# EAGLE board PCBlayout (EAGLE 9.6.2)
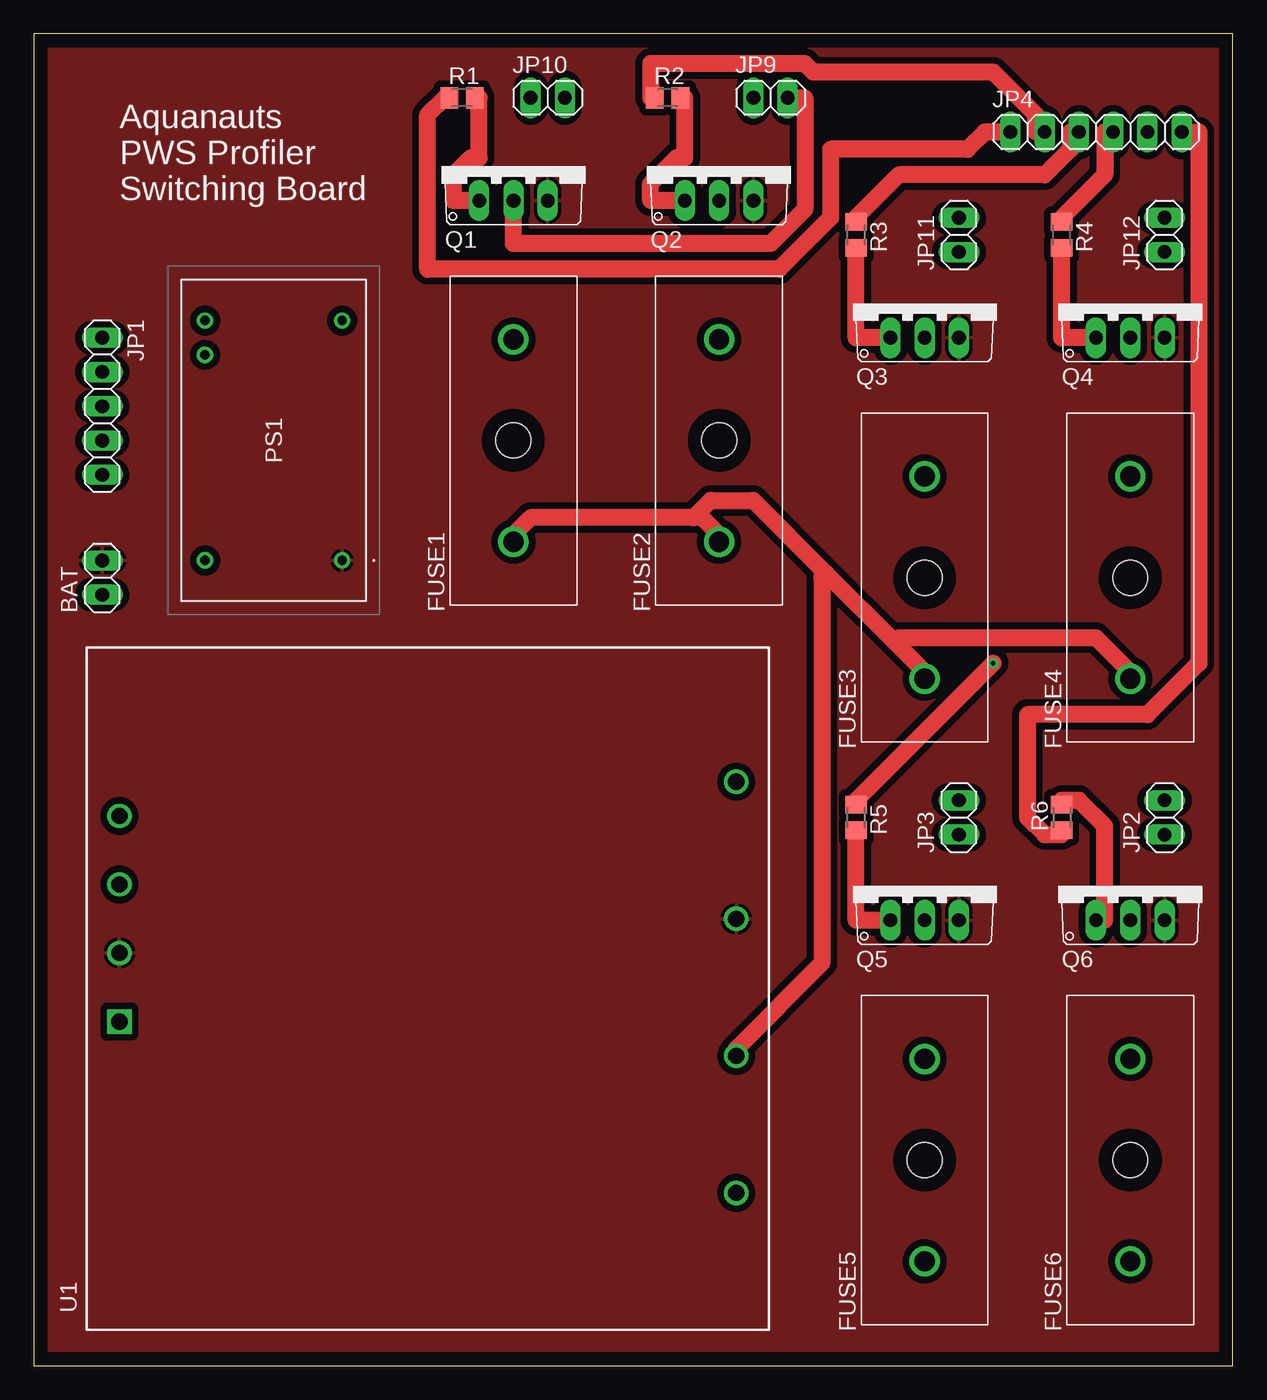
[diagram p0: board, top side]
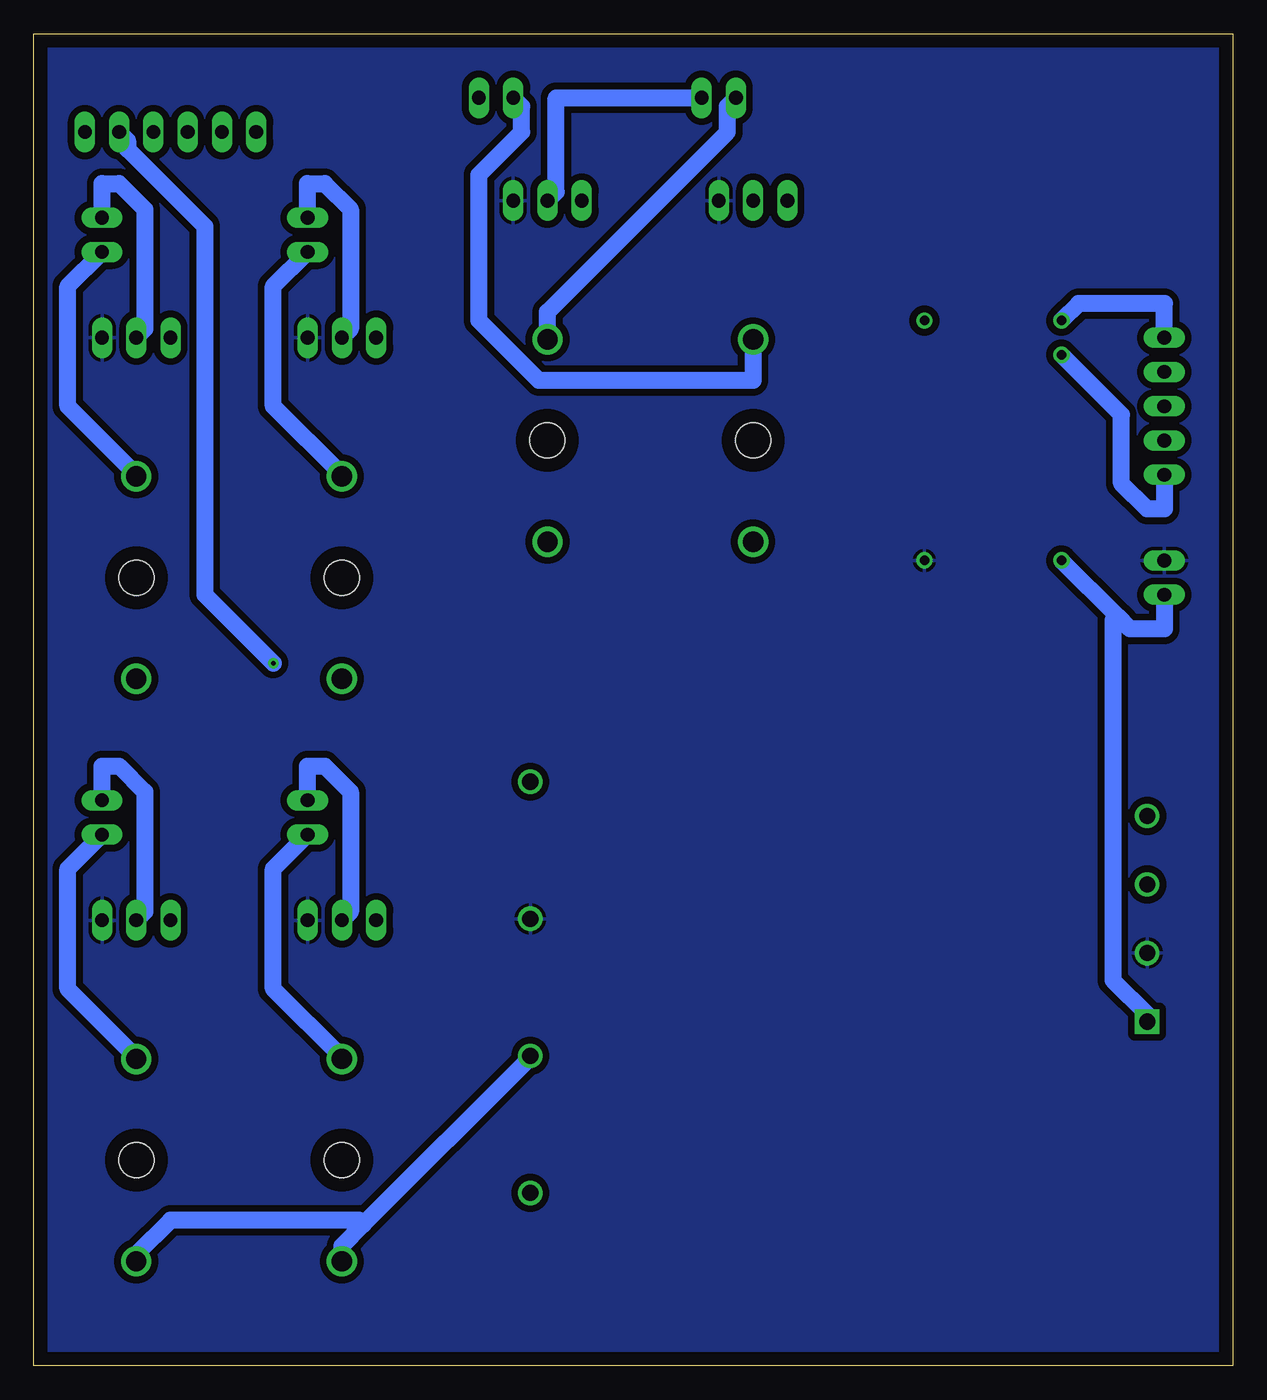
[diagram p1: board, bottom side, seen from below]

Size 88.88 x 98.73 mm. Coordinates in mm from the lower left corner, seen from the top.
Outline: 0,0 88.88,0 88.88,98.73 0,98.73 0,0
Copper layers (1*16): Top 0.036mm / dielectric 1.6mm / Bottom 0.036mm
Design rules "default *": minimum track width 1.25mm, minimum drill 0.35mm, track to track 0.5mm, track to pad 6mil, pad to pad 6mil, via to via 6mil, smd to smd 6mil, copper to edge 40mil, drill to drill 6mil, minimum pad ring 10mil, minimum via ring 8mil, stop-mask expansion 4mil, vias tented up to drill 0mil, thermal gap 10mil

## Footprints (pad centres in the part's own frame; a part is rotated, then mirrored left to right if it is on the bottom)
1X02 = drill 1.016 long: 1 -1.27,0; 2 1.27,0
FUSE_696105003002 = drill 1.5: 1 -7.5,0; 2 7.5,0 | hole 2.6: 0,0
1X05 = drill 1.016 long: 1 -5.08,0; 2 -2.54,0; 3 0,0; 4 2.54,0; 5 5.08,0
1X06 = drill 1.016 long: 1 -6.35,0; 2 -3.81,0; 3 -1.27,0; 4 1.27,0; 5 3.81,0; 6 6.35,0
TEL122411 = drill 0.7 pad 1.2: 1 0,0; 8 17.78,0; 9 17.78,10.16; 10 15.24,10.16; 16 0,10.16
TO220V = drill 1.016 long: 1 -2.54,-2.54; 2 0,-2.54; 3 2.54,-2.54
M0805 = smd 1.3 x 1.6: 1 -0.95,0; 2 0.95,0
CONV_SDM30-24S12 = drill 1.2 pad 1.8 square: 1 -2.43,22.86 | drill 1.2 pad 1.8: 2 2.65,22.86; 3 7.73,22.86; 4 12.81,22.86; 5 -15.13,-22.86; 6 -4.97,-22.86; 7 5.19,-22.86; 8 15.35,-22.86

## Placement (x,y rotation side)
BAT  [1X02]  5.08,58.42 90 top
FUSE1  696105003002  [FUSE_696105003002]  35.56,68.58 90 top
FUSE2  696105003002  [FUSE_696105003002]  50.8,68.58 90 top
FUSE3  696105003002  [FUSE_696105003002]  66.04,58.42 90 top
FUSE4  696105003002  [FUSE_696105003002]  81.28,58.42 90 top
FUSE5  696105003002  [FUSE_696105003002]  66.04,15.24 90 top
FUSE6  696105003002  [FUSE_696105003002]  81.28,15.24 90 top
JP1  Micro USB to Pi  [1X05]  5.08,71.12 270 top
JP2  sensor6  [1X02]  83.82,40.64 90 top
JP3  sensor5  [1X02]  68.58,40.64 90 top
JP4  PI 5V  [1X06]  78.74,91.44 0 top
JP9  sensor1  [1X02]  54.61,93.98 0 top
JP10  sensor2  [1X02]  38.1,93.98 0 top
JP11  sensor3  [1X02]  68.58,83.82 90 top
JP12  sensor4  [1X02]  83.82,83.82 90 top
PS1  TEL_12-2411  [TEL122411]  22.86,59.69 90 top
Q1  [TO220V]  35.56,88.9 0 top
Q2  [TO220V]  50.8,88.9 0 top
Q3  [TO220V]  66.04,78.74 0 top
Q4  [TO220V]  81.28,78.74 0 top
Q5  [TO220V]  66.04,35.56 0 top
Q6  [TO220V]  81.28,35.56 0 top
R1  10k  [M0805]  31.75,93.98 0 top
R2  10k  [M0805]  46.99,93.98 0 top
R3  10k  [M0805]  60.96,83.82 270 top
R4  10k  [M0805]  76.2,83.82 270 top
R5  10k  [M0805]  60.96,40.64 270 top
R6  10k  [M0805]  76.2,40.64 90 top
U1  SDM30-24S12  [CONV_SDM30-24S12]  29.21,27.94 90 top

## Library data of the parts
BAT JP1-JP4 JP9-JP12 = pinhead
FUSE1-FUSE6 = 696105003002; DESCRIPTION: Fuse Block 10A 250V 1 Circuit Cartridge Through Hole; MF: Wurth Electronics; MP: 696105003002; PACKAGE: None; PURCHASE-URL: https://pricing.snapeda.com/search/part/696105003002/?ref=eda
PS1 = TEL_12-2411; DESCRIPTION: DC/DC Converter TEL 12 Series, 12 Watt 5.1 VDC 2'400 mA; HEIGHT: 10.45mm; MANUFACTURER_NAME: Traco Power; MANUFACTURER_PART_NUMBER: TEL 12-2411; MOUSER_PART_NUMBER: 495-TEL12-2411; MOUSER_PRICE-STOCK: https://www.mouser.co.uk/ProductDetail/TRACO-Power/TEL-12-2411?qs=hd1VzrDQEGgh157ULhti9w%3D%3D
Q1-Q6 R1-R6 = adafruit
U1 = SDM30-24S12; DESCRIPTION: Isolated Module DC DC Converter 1 Output 12V 2.5A 18V - 36V Input; DIGI-KEY_PART_NUMBER: 1866-4449-ND; MF: MEAN WELL; MP: SDM30-24S12; PACKAGE: DIP-8 Mean Well; PURCHASE-URL: https://pricing.snapeda.com/search/part/SDM30-24S12/?ref=eda

## Nets
GND: BAT.2 PS1.1 Q1.3 Q2.3 Q3.3 Q4.3 Q5.3 Q6.3 U1.2 U1.7
N$1: JP1.1 PS1.9
N$2: JP1.5 PS1.10
N$3: FUSE1.2 JP9.1
N$4: FUSE2.2 JP10.1
N$5: FUSE3.2 JP11.1
N$6: FUSE4.2 JP12.1
N$7: FUSE1.1 FUSE2.1 FUSE3.1 FUSE4.1 FUSE5.1 FUSE6.1 U1.6
N$8: JP9.2 Q1.2
N$9: JP10.2 Q2.2
N$10: JP11.2 Q3.2
N$11: JP12.2 Q4.2
N$12: Q1.1 R1.2
N$13: Q2.1 R2.2
N$14: Q3.1 R3.2
N$15: Q4.1 R4.2
N$16: JP4.1 R1.1
N$17: JP4.2 R2.1
N$18: JP4.3 R3.1
N$19: JP4.4 R4.1
N$20: FUSE6.2 JP2.1
N$22: JP2.2 Q6.2
N$23: Q5.1 R5.2
N$24: Q6.1 R6.2
N$25: JP4.5 R5.1
N$26: JP4.6 R6.1
N$27: FUSE5.2 JP3.1
N$28: JP3.2 Q5.2
VBAT+: BAT.1 PS1.16 U1.1

## Tracks (layer width: path | path; a pad name or v marks a point on that pad's centre or on a via)
GND
  pour Bottom: 43.18,101.6 87.63,101.6 91.44,97.79 91.44,1.27 87.63,-2.54 0,-2.54 -2.54,0 -2.54,99.06 0,101.6
  pour Top: -1.27,101.6 -3.81,99.06 -3.81,-1.27 -1.27,-3.81 90.17,-3.81 92.71,-1.27 92.71,3.81 92.71,99.06 88.9,102.87 0,102.87
N$1
  Bottom 1.25: PS1.9 11.43,78.74 5.08,78.74 JP1.1
N$2
  Bottom 1.25: PS1.10 8.26,70.48 8.26,65.41 6.35,63.5 5.08,63.5 JP1.5
N$3
  Bottom 1.25: JP9.1 52.7,93.34 52.7,91.44 55.88,88.27 55.88,77.47 51.44,73.03 35.56,73.03 FUSE1.2
N$4
  Bottom 1.25: JP10.1 37.47,93.34 37.47,91.44 50.8,78.11 FUSE2.2
N$5
  Bottom 1.25: JP11.1 71.12,80.01 71.12,71.12 66.04,66.04 FUSE3.2
N$6
  Bottom 1.25: JP12.1 86.36,80.01 86.36,71.12 81.28,66.04 FUSE4.2
N$7
  Top 1.25: 48.9,62.87 49.53,62.87 50.8,61.59 FUSE2.1 | 48.9,62.87 36.83,62.87 35.56,61.59 FUSE1.1 | 58.74,58.74 53.34,64.14 50.16,64.14 48.9,62.87 | 58.74,58.74 63.82,53.66 | 63.82,53.66 66.04,51.44 FUSE3.1 | FUSE4.1 81.28,51.44 78.74,53.98 64.14,53.98 63.82,53.66 | U1.6 52.07,23.5 58.42,29.84 58.42,58.42 58.74,58.74
  Bottom 1.25: 64.45,10.48 66.04,8.89 FUSE5.1 | 64.45,10.48 52.07,22.86 U1.6 | FUSE6.1 81.28,8.26 78.74,10.79 64.77,10.79 64.45,10.48
N$8
  Top 1.25: Q1.2 35.56,83.19 54.61,83.19 57.15,85.72 57.15,93.98 JP9.2
N$9
  Bottom 1.25: JP10.2 50.16,93.98 50.16,87 Q2.2
N$10
  Bottom 1.25: Q3.2 65.41,76.83 65.41,85.72 67.31,87.63 68.58,87.63 JP11.2
N$11
  Bottom 1.25: Q4.2 80.64,76.83 80.64,85.72 82.55,87.63 83.82,87.63 JP12.2
N$12
  Top 1.25: Q1.1 31.11,86.36 31.11,88.27 32.38,89.53 33.02,89.53 33.02,93.98 R1.2
N$13
  Top 1.25: Q2.1 45.72,86.36 45.72,87.63 47.62,89.53 48.26,89.53 48.26,93.98 R2.2
N$14
  Top 1.25: R3.2 60.96,76.2 Q3.1
N$15
  Top 1.25: R4.2 76.2,76.2 Q4.1
N$16
  Top 1.25: JP4.1 70.48,91.44 69.22,90.17 59.05,90.17 59.05,85.09 55.24,81.28 29.21,81.28 29.21,92.71 30.48,93.98 R1.1
N$17
  Top 1.25: JP4.2 74.3,91.44 74.3,92.71 71.12,95.89 57.78,95.89 57.15,96.52 45.72,96.52 45.72,93.98 R2.1
N$18
  Top 1.25: JP4.3 76.83,91.44 76.83,90.17 74.93,88.27 64.14,88.27 60.96,85.09 R3.1
N$19
  Top 1.25: JP4.4 79.38,91.44 79.38,88.27 76.2,85.09 R4.1
N$20
  Bottom 1.25: JP2.1 86.36,36.83 86.36,27.94 81.28,22.86 FUSE6.2
N$22
  Bottom 1.25: Q6.2 80.64,33.66 80.64,42.55 82.55,44.45 83.82,44.45 JP2.2
N$23
  Top 1.25: R5.2 60.96,33.02 Q5.1
N$24
  Top 1.25: Q6.1 79.38,33.02 79.38,40.01 77.47,41.91 76.2,41.91 R6.2
N$25  (via drill 0.35)
  Top 1.25: v71.12,52.07 60.96,41.91 R5.1
  Bottom 1.25: v71.12,52.07 76.2,57.15 76.2,84.45 81.92,90.17 81.92,90.81 JP4.5
N$26
  Top 1.25: JP4.6 86.36,91.44 86.36,52.07 82.55,48.26 73.66,48.26 73.66,40.64 74.93,39.37 76.2,39.37 R6.1
N$27
  Bottom 1.25: JP3.1 71.12,36.83 71.12,27.94 66.04,22.86 FUSE5.2
N$28
  Bottom 1.25: Q5.2 65.41,33.66 65.41,42.55 67.31,44.45 68.58,44.45 JP3.2
VBAT+
  Bottom 1.25: 8.57,55.56 7.62,54.61 5.08,54.61 BAT.1 | 8.57,55.56 PS1.16 | U1.1 6.35,26.04 8.89,28.57 8.89,55.24 8.57,55.56

## Text on the board
tPlace: Aquanauts / PWS Profiler / Switching Board